# Altium PCB fpga-wing.PcbDoc
Units mm, origin at the board's own origin, x right, y up, seen from the top; angles counter-clockwise.
Board outline 87.63 x 71.12 mm, 4 copper layers (Top Layer, Internal Plane 1, Internal Plane 2, Bottom Layer), stack 0.462 mm thick; 41 components, 108 nets, 296 pads, 0 vias.
Unrouted connection lines stored in the file: 19.
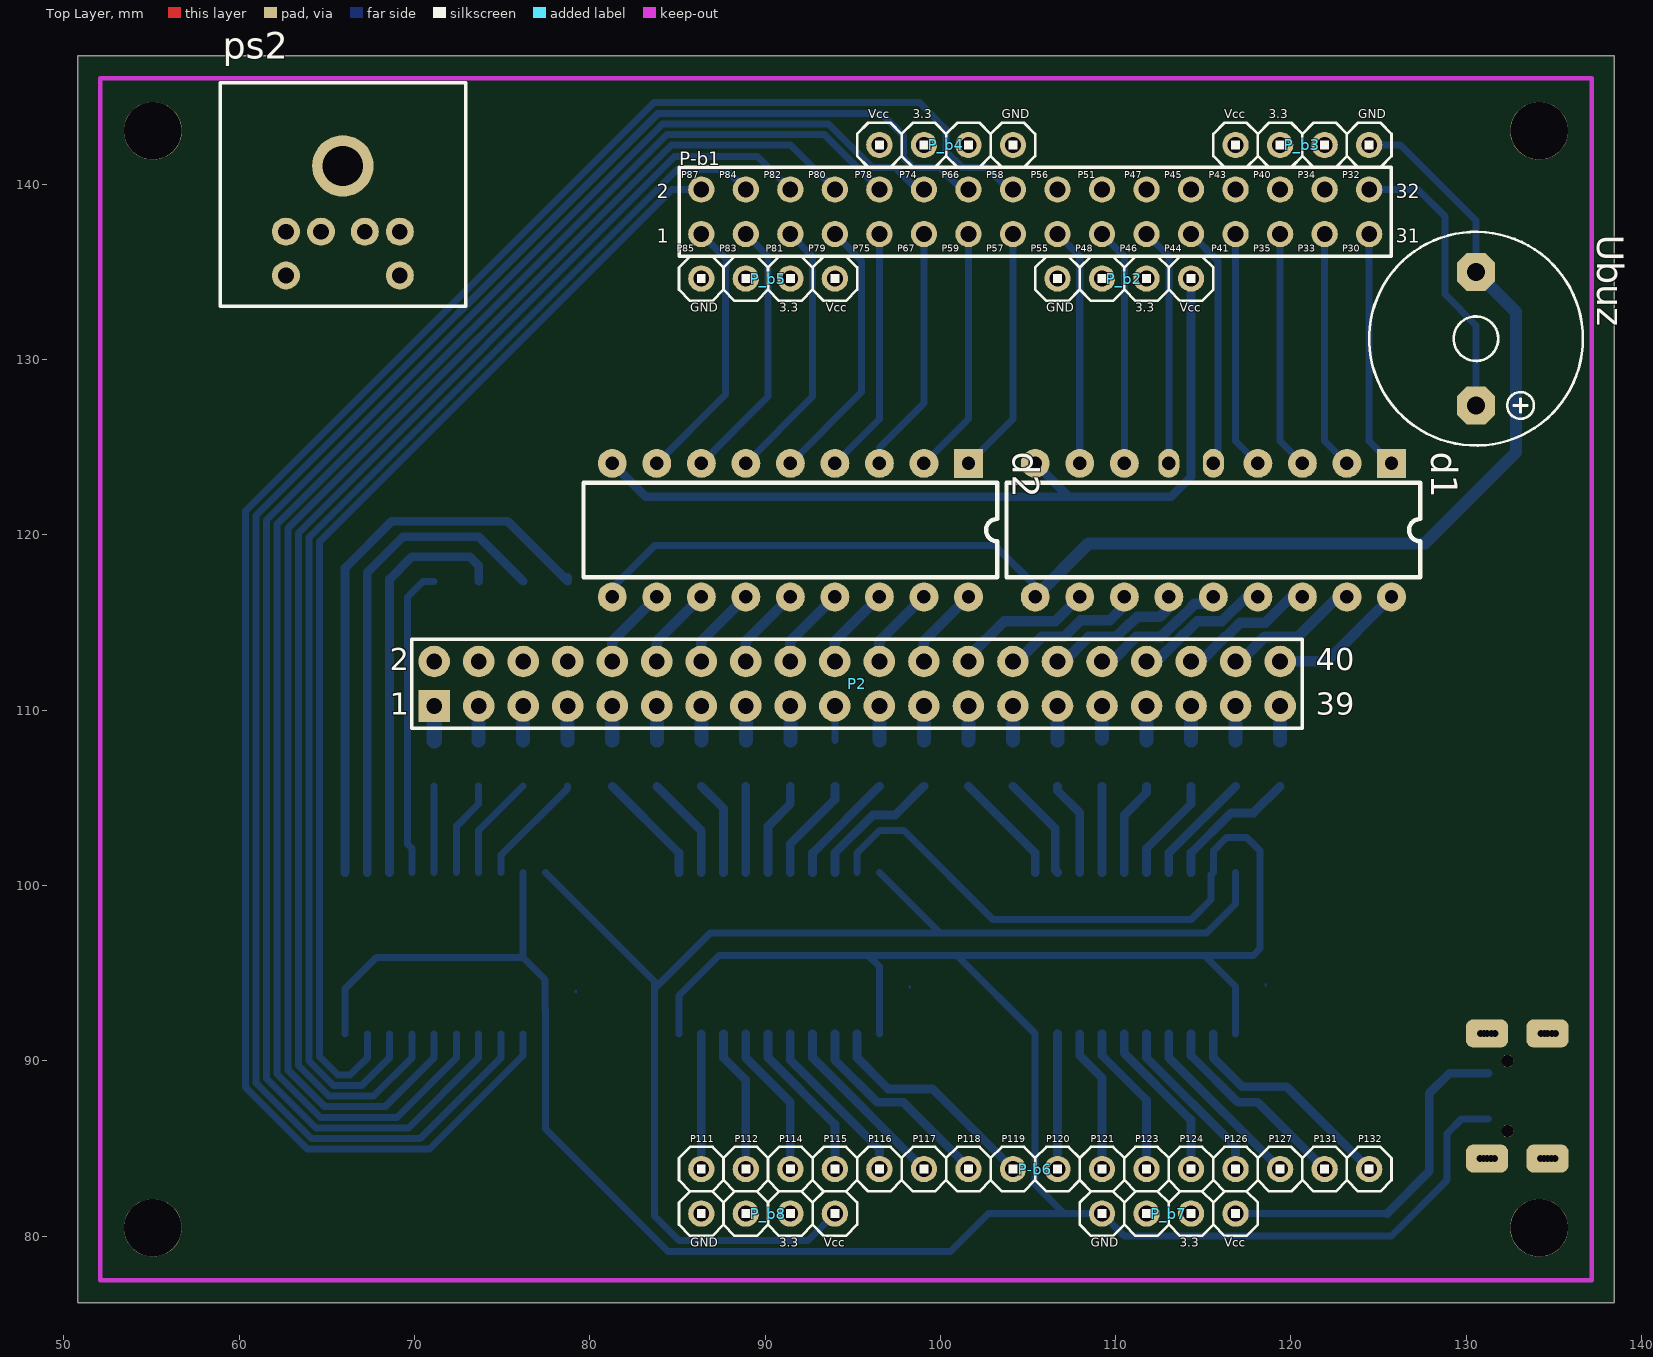
[diagram p0: Top Layer view]
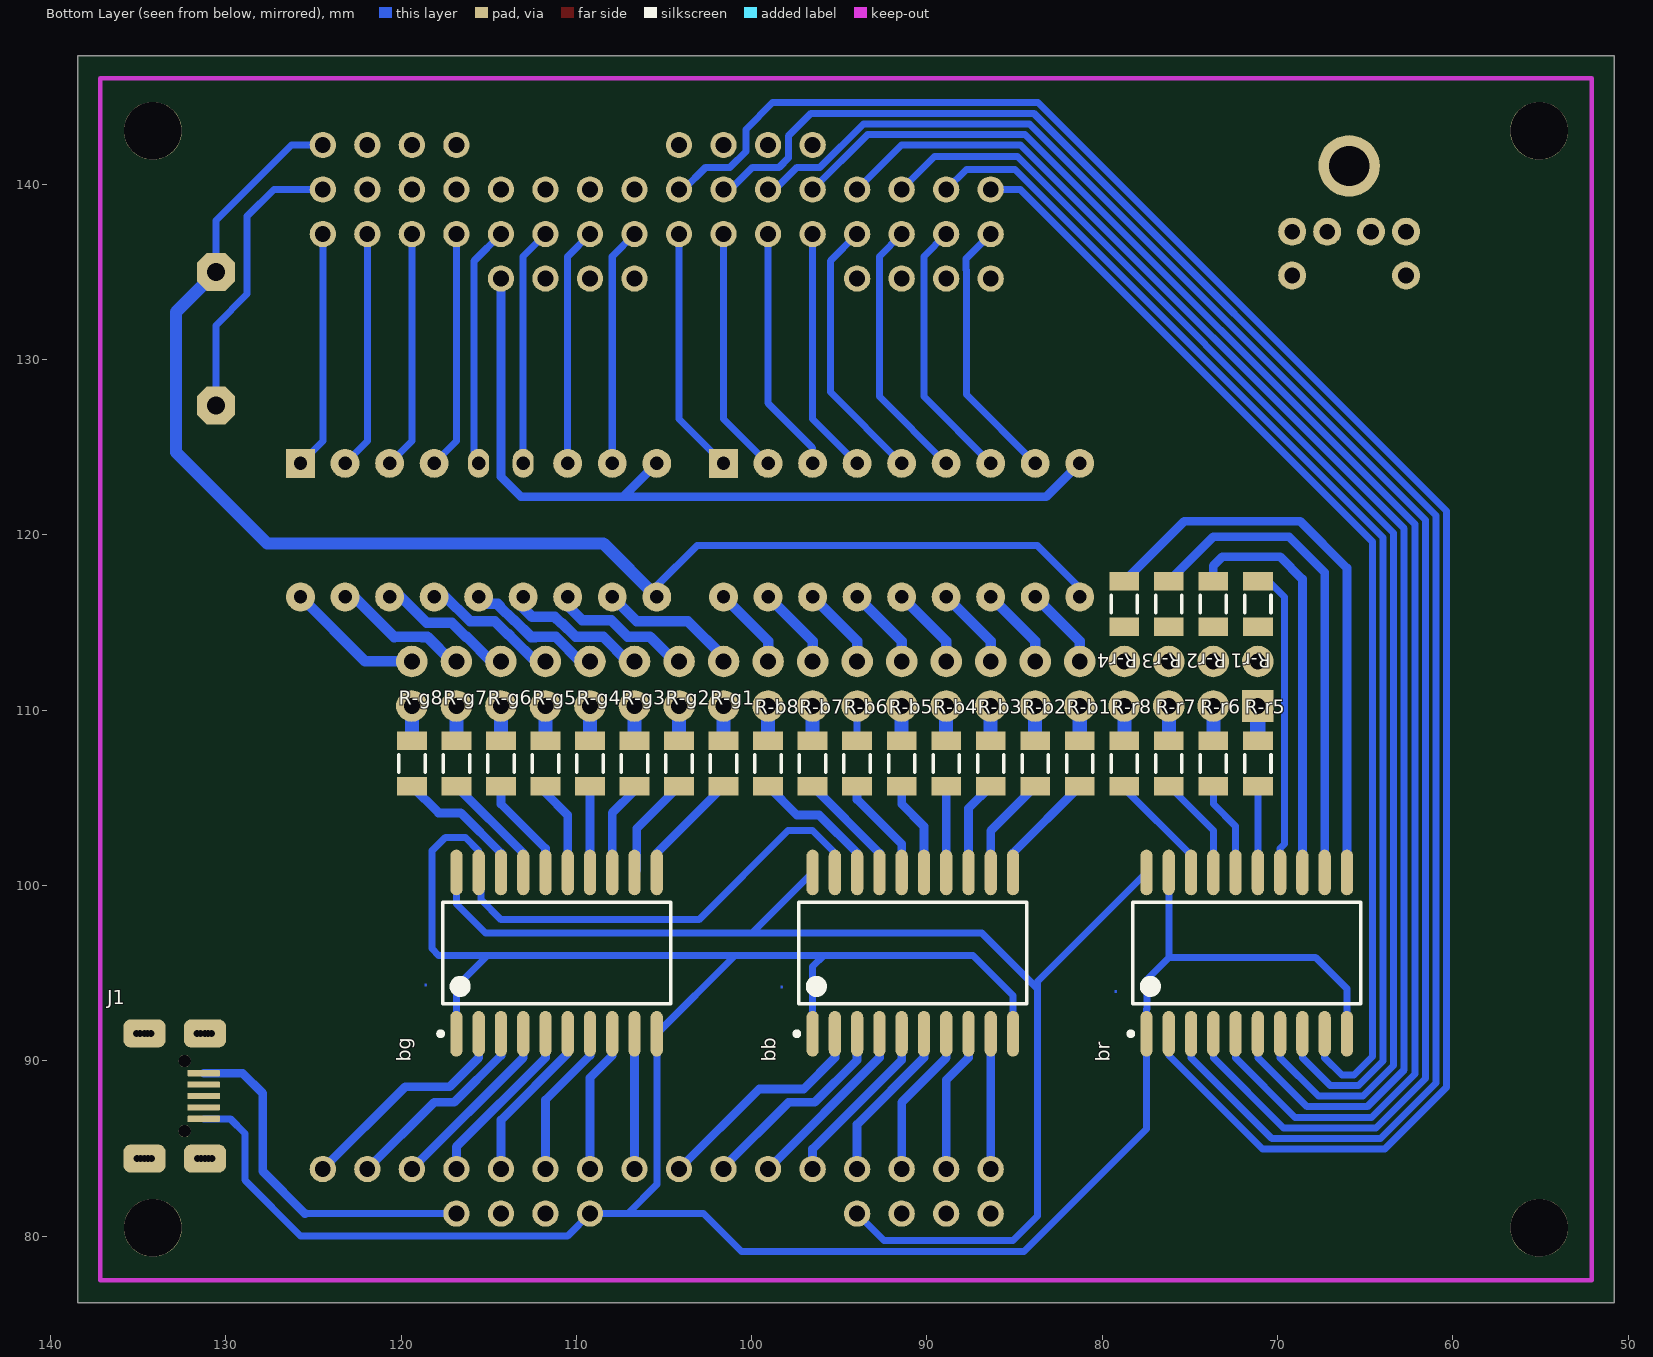
[diagram p1: Bottom Layer view, seen from below]
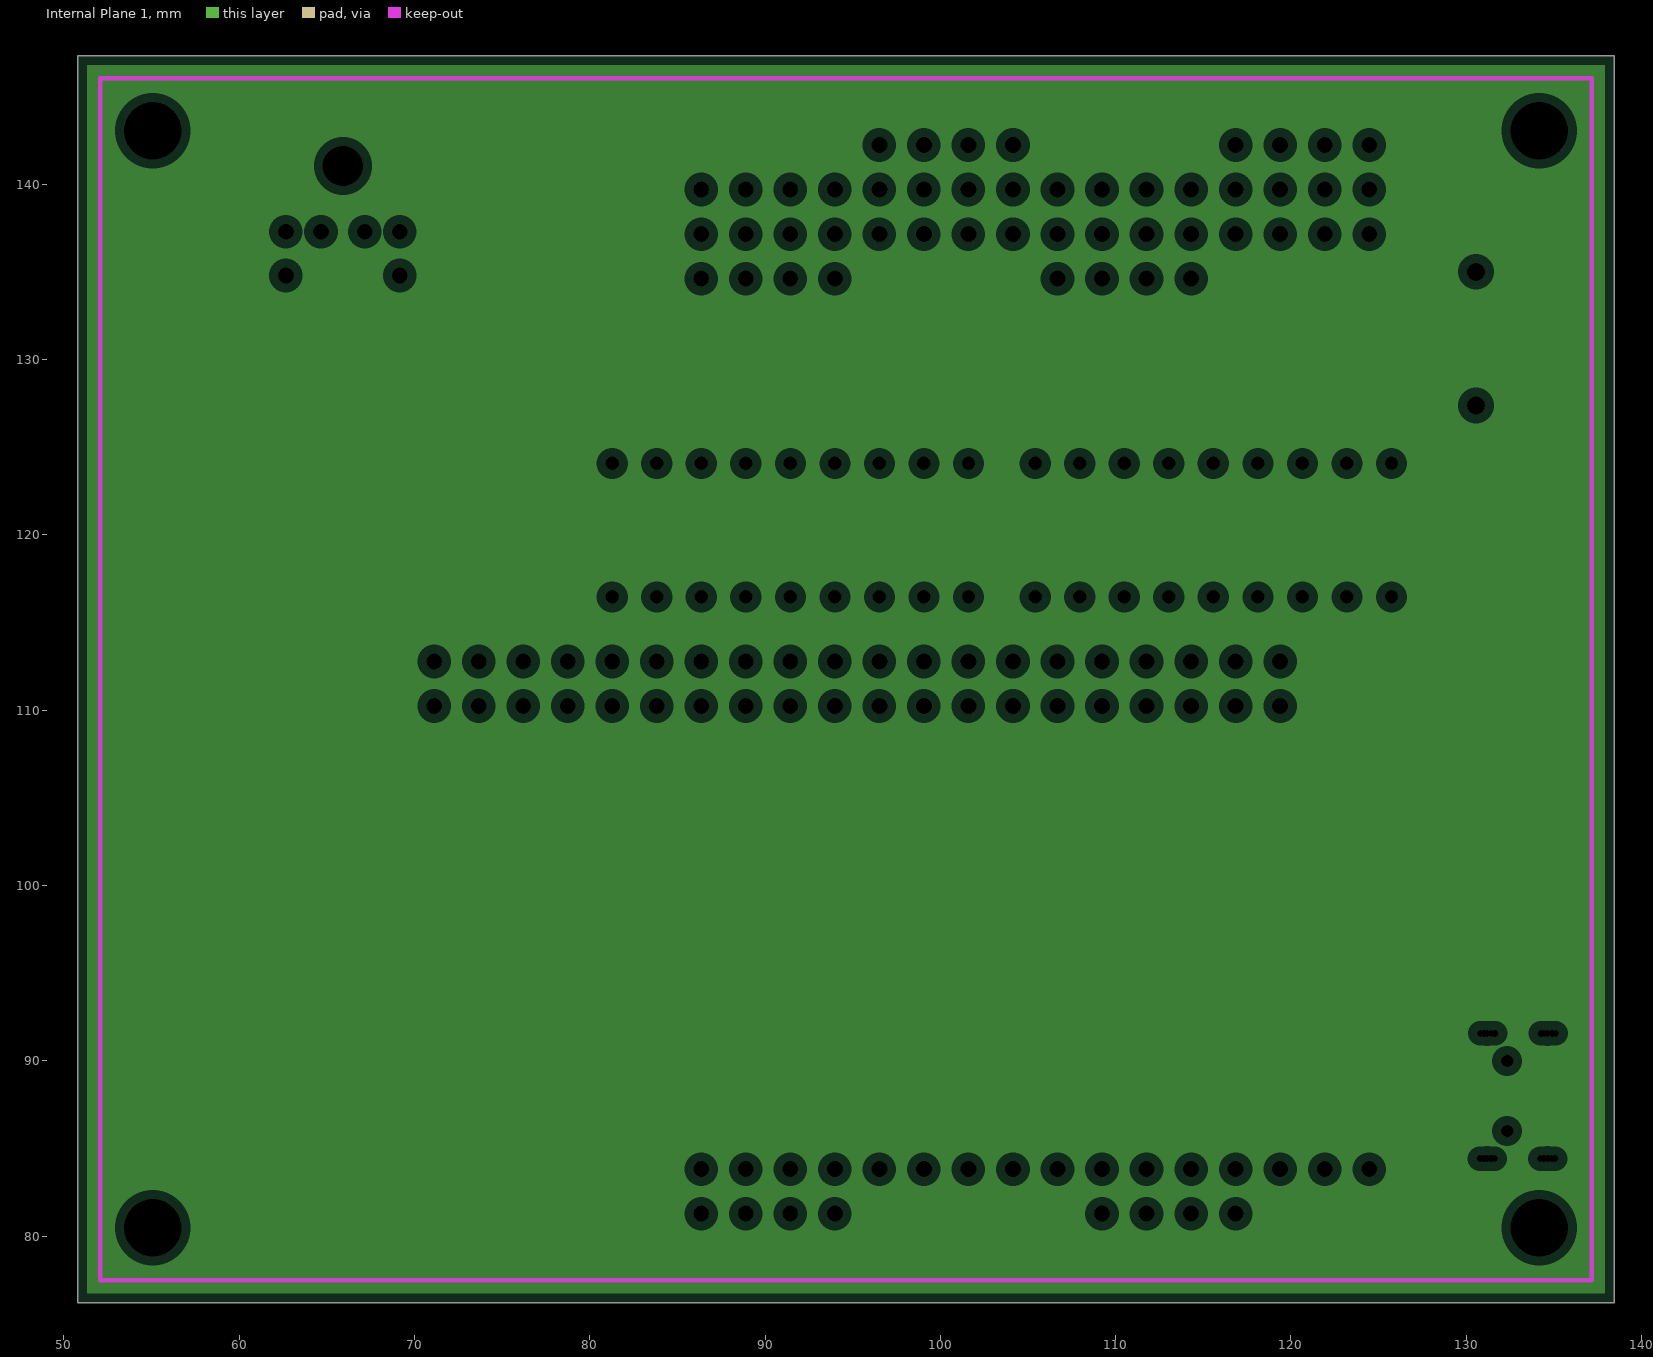
[diagram p2: Internal Plane 1, clearances drawn from the general rule]
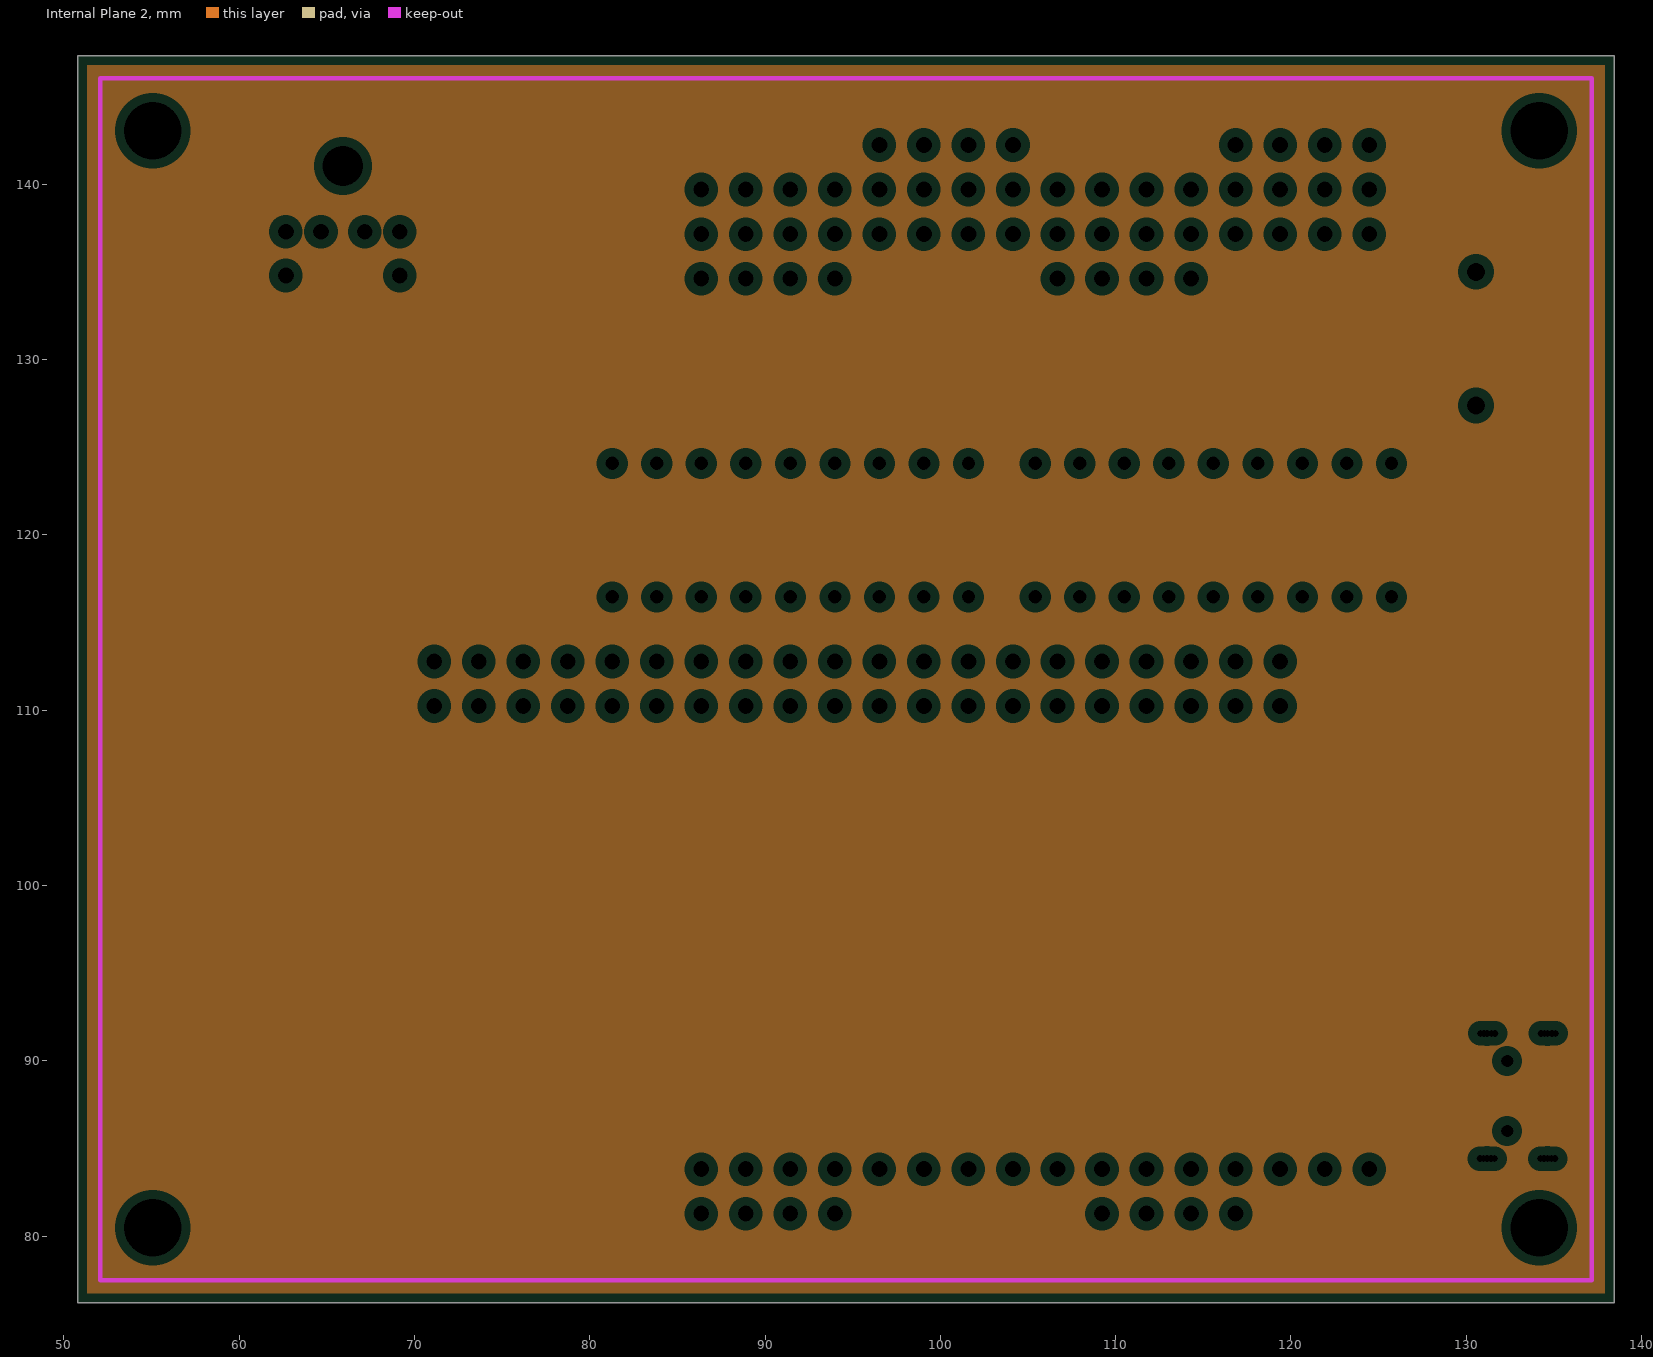
[diagram p3: Internal Plane 2, clearances drawn from the general rule]
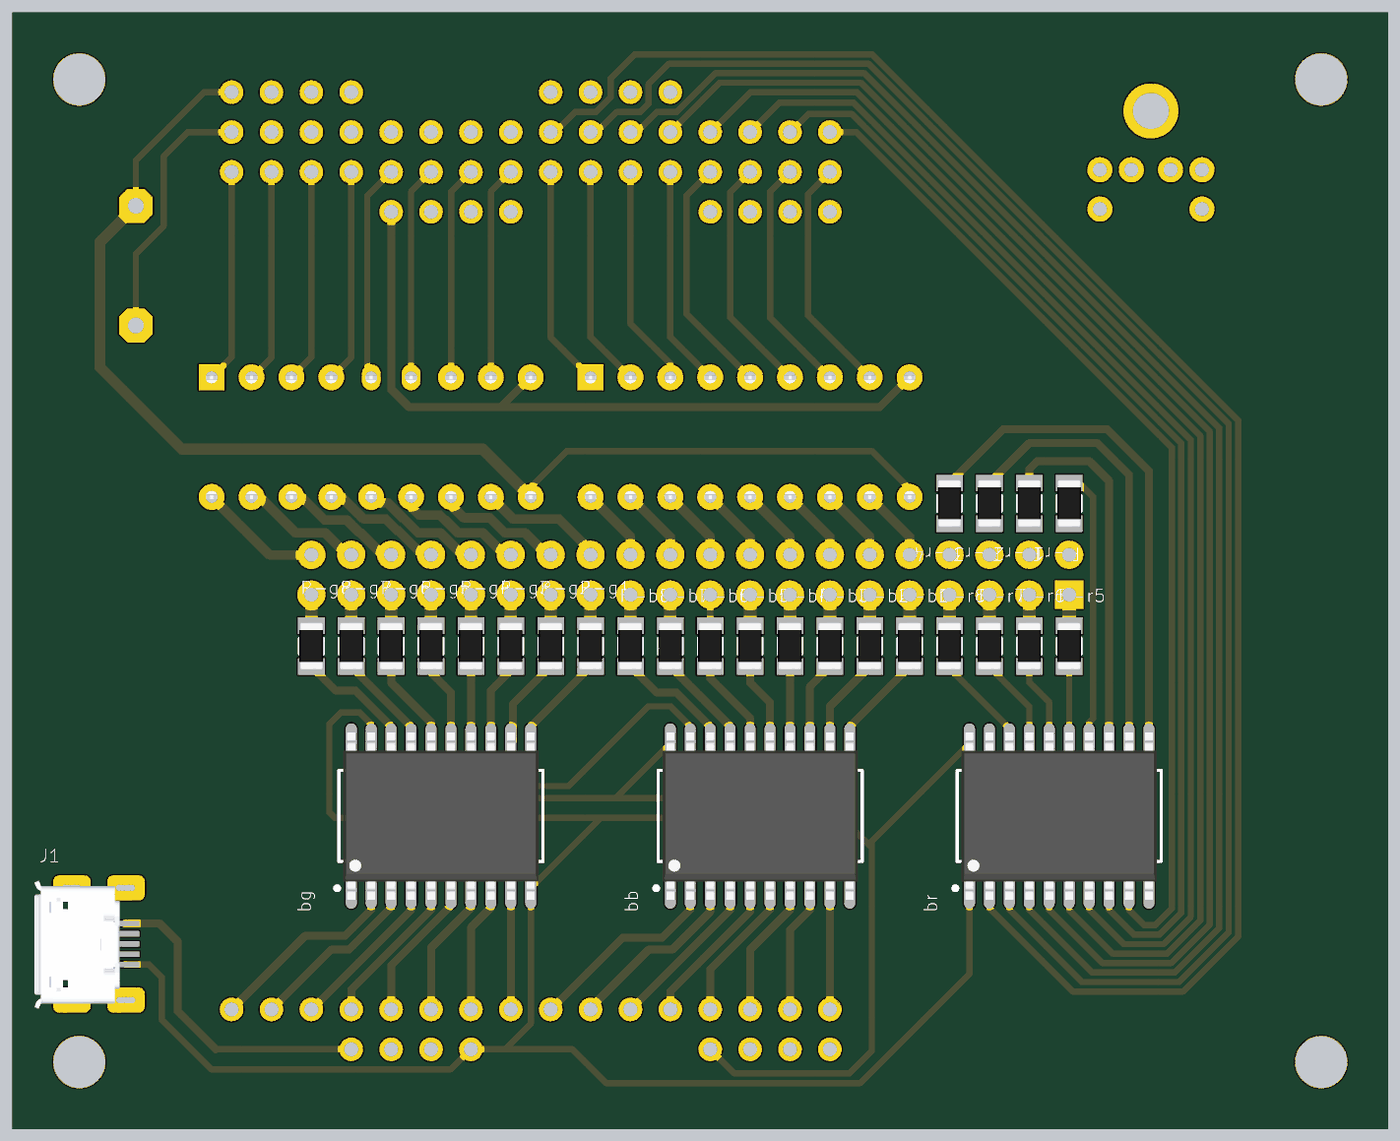
[diagram p4: 3D render of the assembled board from below, using the file's embedded part models]

## Layer stack, top to bottom
Top Solder: solder mask 0.0102, Solder Resist, Dk 3.5
Top Layer: signal copper 0.0356
Internal Plane 1: plane copper 0.0356
Internal Plane 2: plane copper 0.0356
Dielectric 1: dielectric 0.32, FR-4, Dk 4.8
Bottom Layer: signal copper 0.0356
Bottom Solder: solder mask 0.0102, Solder Resist, Dk 3.5

## Board outline
50.8,76.2 138.43,76.2 138.43,147.32 50.8,147.32

## Design rules (kind name [scope] priority, off if disabled: settings)
Clearance [All] p1: gap=0.203 ignorepadtopadclearanceinfootprint=FALSE except(0: Arc-Hole Track-Hole SMDPad-Hole THPad-Hole Via-Hole Fill-Hole Poly-Hole Region-Hole Text-Hole)
PlaneClearance [All] p1: clearance=0.508
PlaneConnect [All] p1: planeconnectstyle=Relief reliefexpansion=0.508 reliefentries=4 reliefconductorwidth=0.254 reliefairgap=0.254
PolygonConnect [All] p1: connectstyle=Relief reliefconductorwidth=0.254 reliefentries=4 polygonreliefangle="90 Angle" airgapwidth=0.254
RoomDefinition Sheet2 [InComponentClass('Sheet2')] p1: confinementstyle=ConfineIn formatcopy=TRUE lockcomponents=FALSE outline 139.573,75.184 145.161,75.184 145.161,133.477 139.573,133.477
RoutingVias [All] p1: holewidth=0.635 width=1.016 viastyle="Through Hole" minholewidth=0.711 minwidth=1.27 maxholewidth=0.711 maxwidth=1.27
SolderMaskExpansion [All] p1: expansion=0.102 istentingtop=FALSE
Width [All] p1: maxlimit=1.5 minlimit=0.3 preferedwidth=0.4
28 further rules are at their usual default settings.

## Components (designator, comment, footprint, x,y, rotation, side; value= is the part's Value field where it differs from the comment)
bb "74541(Bufer)" SO20_M 90.805,96.139 r90 bottom
bg "74541(Bufer)" SO20_M 111.125,96.139 r90 bottom
br "74541(Bufer)" SO20_M 71.755,96.139 r90 bottom
d1 "udn2981" DIP18#1 115.57,120.269 r270 top
d2 "udn2981" DIP18#2 91.44,120.269 r270 top
J1 "Micro_USB" microUSB 134.239,88.011 r180 bottom
P2 "Header 20X2" HDR2X20 71.12,110.236 r0 top locked
P-b1 "Header 16X2" HDR2X16 86.36,137.16 r0 top locked
P-b6 "Header 16" My_1X16 105.41,83.82 r0 top locked
P_b2 "Header 4" My_1X04 110.49,134.62 r0 top locked
P_b3 "Header 4" My_1X04 120.65,142.24 r0 top locked
P_b4 "Header 4" My_1X04 100.33,142.24 r0 top locked
P_b5 "Header 4" My_1X04 90.17,134.62 r0 top locked
P_b7 "Header 4" My_1X04 113.03,81.28 r0 top locked
P_b8 "Header 4" My_1X04 90.17,81.28 r0 top locked
ps2 "PS2-6PIN" My_PS2-6PIN 65.913,145.796 r0 top
R-b1 "Res1" SMD_RES_1206 81.28,105.664 r90 bottom
R-b2 "Res1" SMD_RES_1206 83.82,105.664 r90 bottom
R-b3 "Res1" SMD_RES_1206 86.36,105.664 r90 bottom
R-b4 "Res1" SMD_RES_1206 88.9,105.664 r90 bottom
R-b5 "Res1" SMD_RES_1206 91.44,105.664 r90 bottom
R-b6 "Res1" SMD_RES_1206 93.98,105.664 r90 bottom
R-b7 "Res1" SMD_RES_1206 96.52,105.664 r90 bottom
R-b8 "Res1" SMD_RES_1206 99.06,105.664 r90 bottom
R-g1 "Res1" SMD_RES_1206 101.6,105.664 r90 bottom
R-g2 "Res1" SMD_RES_1206 104.14,105.664 r90 bottom
R-g3 "Res1" SMD_RES_1206 106.68,105.664 r90 bottom
R-g4 "Res1" SMD_RES_1206 109.22,105.664 r90 bottom
R-g5 "Res1" SMD_RES_1206 111.76,105.664 r90 bottom
R-g6 "Res1" SMD_RES_1206 114.3,105.664 r90 bottom
R-g7 "Res1" SMD_RES_1206 116.84,105.664 r90 bottom
R-g8 "Res1" SMD_RES_1206 119.38,105.664 r90 bottom
R-r1 "Res1" SMD_RES_1206 71.12,117.348 r270 bottom
R-r2 "Res1" SMD_RES_1206 73.66,117.348 r270 bottom
R-r3 "Res1" SMD_RES_1206 76.2,117.348 r270 bottom
R-r4 "Res1" SMD_RES_1206 78.74,117.348 r270 bottom
R-r5 "Res1" SMD_RES_1206 71.12,105.664 r90 bottom
R-r6 "Res1" SMD_RES_1206 73.66,105.664 r90 bottom
R-r7 "Res1" SMD_RES_1206 76.2,105.664 r90 bottom
R-r8 "Res1" SMD_RES_1206 78.74,105.664 r90 bottom
Ubuz "Buzzer small" My_Buzzer 130.556,131.191 r270 top

## Footprints (in the part's own frame and the unit in brackets; to place one, negate y for a bottom-side part, rotate by r counter-clockwise, add the part's x,y. Pads: shape width x height; smd on the part's side, far side on the other; paste and mask are expansions set on the pad)
DIP18#1 [mil]
  rect 65x65 hole 30: 1(-150,400)
  round 65 hole 30: 2(-150,300) 3(-150,200) 4(-150,100) 7(-150,-200) 8(-150,-300) 9(-150,-400) 10(150,-400) 11(150,-300) 12(150,-200) 13(150,-100) 14(150,0) 15(150,100) 16(150,200) 17(150,300) 18(150,400)
  oval 65x47.24 hole 30: 5(-150,0) 6(-150,-100)
  silkscreen extent -106,-465 106,465, body extent -155,-453 155,453, height 200
DIP18#2 [mil]
  rect 65x65 hole 30: 1(-150,400)
  round 65 hole 30: 2(-150,300) 3(-150,200) 4(-150,100) 5(-150,0) 6(-150,-100) 7(-150,-200) 8(-150,-300) 9(-150,-400) 10(150,-400) 11(150,-300) 12(150,-200) 13(150,-100) 14(150,0) 15(150,100) 16(150,200) 17(150,300) 18(150,400)
  silkscreen extent -106,-465 106,465, body extent -155,-453 155,453, height 200
HDR2X16 [mm] "Connector; Header; 16x2 Position"
  round 1.5 hole 0.9: 1(0,0) 2(0,2.54) 3(2.54,0) 4(2.54,2.54) 5(5.08,0) 6(5.08,2.54) 7(7.62,0) 8(7.62,2.54) 9(10.16,0) 10(10.16,2.54) 11(12.7,0) 12(12.7,2.54) 13(15.24,0) 14(15.24,2.54) 15(17.78,0) 16(17.78,2.54) 17(20.32,0) 18(20.32,2.54) 19(22.86,0) 20(22.86,2.54) 21(25.4,0) 22(25.4,2.54) 23(27.94,0) 24(27.94,2.54) 25(30.48,0) 26(30.48,2.54) 27(33.02,0) 28(33.02,2.54) 29(35.56,0) 30(35.56,2.54) 31(38.1,0) 32(38.1,2.54)
  silkscreen extent -1.27,-1.27 39.37,3.81
HDR2X20 [mm] "Connector; Header; 20x2 Position"
  rect 1.8x1.8 hole 0.9: 1(0,0)
  round 1.8 hole 0.9: 2(0,2.54) 3(2.54,0) 4(2.54,2.54) 5(5.08,0) 6(5.08,2.54) 7(7.62,0) 8(7.62,2.54) 9(10.16,0) 10(10.16,2.54) 11(12.7,0) 12(12.7,2.54) 13(15.24,0) 14(15.24,2.54) 15(17.78,0) 16(17.78,2.54) 17(20.32,0) 18(20.32,2.54) 19(22.86,0) 20(22.86,2.54) 21(25.4,0) 22(25.4,2.54) 23(27.94,0) 24(27.94,2.54) 25(30.48,0) 26(30.48,2.54) 27(33.02,0) 28(33.02,2.54) 29(35.56,0) 30(35.56,2.54) 31(38.1,0) 32(38.1,2.54) 33(40.64,0) 34(40.64,2.54) 35(43.18,0) 36(43.18,2.54) 37(45.72,0) 38(45.72,2.54) 39(48.26,0) 40(48.26,2.54)
  silkscreen extent -1.27,-1.27 49.53,3.81
microUSB [mm]
  rrect20% 1.85x0.35 smd: 1(2.98,1.277) 2(2.98,0.627) 3(2.98,-0.023) 4(2.98,-0.673) 5(2.98,-1.323)
  round 0 hole 0.4: ""(-0.845,3.552) ""(-0.82,-3.598) ""(-0.645,3.552) ""(-0.62,-3.598) ""(-0.22,3.552) ""(-0.195,-3.598) ""(-0.02,3.552) ""(0.005,-3.598) ""(2.605,3.552) ""(2.63,-3.598) ""(2.805,3.552) ""(2.83,-3.598) ""(3.23,3.552) ""(3.255,-3.598) ""(3.43,3.552) ""(3.455,-3.598)
  rrect50% 2.4x1.6 hole 0.4 paste+0: ""(-0.395,-3.593)
  rrect50% 2.4x1.6 hole 0.4: ""(-0.395,3.547) ""(3.055,-3.593) ""(3.055,3.547)
  round 0.7 hole 0.7: ""(1.905,-2.023) ""(1.905,1.977)
  body extent -0.01,-0.07 -0.01,-0.07, height 1.27
My_1X04 [mm]
  round 1.5 hole 0.9: 1(-3.81,0) 2(-1.27,0) 3(1.27,0) 4(3.81,0)
  silkscreen extent -5.08,-1.27 5.08,1.27
My_1X16 [mm]
  round 1.5 hole 0.9: 1(-19.05,0) 2(-16.51,0) 3(-13.97,0) 4(-11.43,0) 5(-8.89,0) 6(-6.35,0) 7(-3.81,0) 8(-1.27,0) 9(1.27,0) 10(3.81,0) 11(6.35,0) 12(8.89,0) 13(11.43,0) 14(13.97,0) 15(16.51,0) 16(19.05,0)
  silkscreen extent -20.32,-1.27 20.32,1.27
My_Buzzer [mil]
  oct 85x85 hole 40: +(150,0) -(-150,0)
  silkscreen extent -240,-240 240,240
My_PS2-6PIN [mm]
  round 1.6 hole 0.9: 1(-1.25,-8.5) 2(1.25,-8.5) 3(-3.25,-8.5) 4(3.25,-8.5) 5(-3.25,-11) 6(3.25,-11)
  round 3.5 hole 2.3: S(0,-4.75)
  silkscreen extent -7,-12.75 7,0
SMD_RES_1206 [mm] "Chip Resistor, 2-Leads, Body 3.2x1.6mm, IPC High Density _ (0.125 W)"
  rect 1.05x1.7 smd: 1(0,0) 2(2.596,0)
  silkscreen extent 0.8,-0.75 1.8,0.75, body extent 1.3,0 1.3,0
SO20_M [mm] "SOIC, 20-Leads, Body 12.8x7.5mm, Pitch 1.27mm, IPC Low Density"
  oval 2.6x0.7 smd: 1(-4.6,5.715) 2(-4.6,4.445) 3(-4.6,3.175) 4(-4.6,1.905) 5(-4.6,0.635) 6(-4.6,-0.635) 7(-4.6,-1.905) 8(-4.6,-3.175) 9(-4.6,-4.445) 10(-4.6,-5.715) 11(4.6,-5.715) 12(4.6,-4.445) 13(4.6,-3.175) 14(4.6,-1.905) 15(4.6,-0.635) 16(4.6,0.635) 17(4.6,1.905) 18(4.6,3.175) 19(4.6,4.445) 20(4.6,5.715)
  silkscreen extent -4.72,-6.5 2.9,6.74, body extent 0,5.72 0,5.72

## Part data
P2: "Header, 20-Pin, Dual row"
P-b1: "Header, 16-Pin, Dual row"
P-b6: "Header, 16-Pin"
P_b2 P_b3 P_b4 P_b5 P_b7 P_b8: "Header, 4-Pin"
ps2: "6 Pin Through Hole PS2 Socket (Kycon P/N)"
R-b1 R-b2 R-b3 R-b4 R-b5 R-b6 R-b7 R-b8 R-g1 R-g2 R-g3 R-g4 R-g5 R-g6 R-g7 R-g8 R-r1 R-r2 R-r3 R-r4 R-r5 R-r6 R-r7 R-r8: "Resistor"
Ubuz: library part Buzzer, "5-12v small buzzer (12mm)"

## Free pads (board coordinates)
  round 3.3 hole 3.3: 0(55.07,80.47)
  round 3.302 hole 3.302: 0(55.07,143.05) 0(134.16,80.47) 0(134.16,143.05)

## Nets (pads, with @x,y where several pads share a name; then routed paths per layer and width w, separated by ;. In a path a pad name is that pad's centre, name@x,y a point inside that pad or via, vN(x,y) a via of type N, cw(c..) or ccw(c..) an arc to the next point about the centre after c; other vN are vias at no path point)
3.3V: P_b2.3 P_b3.2 P_b4.2 P_b5.3 P_b7.3 P_b8.3
A1: d1.11 P2.26 | length 8
  Bottom Layer w0.6: P2.26 101.6,113.03 103.632,115.062 106.553,115.062 d1.11
A2: d1.12 P2.28 | length 8.2
  Bottom Layer w0.6: P2.28 104.394,112.776 105.797,114.179 107.067,114.179 108.018,115.13 109.669,115.13 110.49,115.951 d1.12
A3: d1.13 P2.30 | length 8.2
  Bottom Layer w0.6: P2.30 107.061,112.776 108.464,114.179 110.043,114.179 110.846,114.982 110.892,114.982 111.226,115.316 112.522,115.316 113.03,115.824 d1.13
A4: d1.14 P2.32 | length 8.1
  Bottom Layer w0.6: P2.32 109.776,112.776 111.179,114.179 112.341,114.179 112.347,114.173 112.577,114.173 113.534,115.13 113.58,115.13 114.359,115.909 114.359,115.955 114.482,116.078 115.57,116.078 d1.14
A5: d1.15 P2.34 | length 8.7
  Bottom Layer w0.6: P2.34 112.316,112.776 112.897,113.357 113.139,113.6 113.624,114.085 113.867,114.327 113.913,114.327 114.648,115.062 116.052,115.062 117.526,116.535 118.11,115.951 d1.15
A6: d1.16 P2.36 | length 7.9
  Bottom Layer w0.6: P2.36 114.856,112.776 116.259,114.179 116.305,114.179 117.108,114.982 118.538,114.982 120.015,116.459 d1.16
A7: d1.17 P2.38 | length 7.9
  Bottom Layer w0.6: P2.38 117.094,112.776 118.491,114.173 118.793,114.173 118.799,114.179 120.39,114.179 120.396,114.173 122.682,116.459 d1.17
A8: d1.18 P2.40 | length 7.9
  Bottom Layer w0.6: P2.40 122.047,112.776 d1.18
A9: d2.18 P2.24 | length 4.7
  Bottom Layer w0.6: P2.24 99.06,113.919 d2.18
A10: d2.17 P2.22 | length 4.7
  Bottom Layer w0.6: P2.22 96.52,113.919 d2.17
A11: d2.16 P2.20 | length 4.7
  Bottom Layer w0.6: P2.20 93.98,113.919 d2.16
A12: d2.15 P2.18 | length 4.7
  Bottom Layer w0.6: P2.18 91.44,113.919 d2.15
A13: d2.14 P2.16 | length 4.7
  Bottom Layer w0.6: P2.16 88.9,113.919 d2.14
A14: d2.13 P2.14 | length 4.7
  Bottom Layer w0.6: P2.14 86.36,113.919 d2.13
A15: d2.12 P2.12 | length 4.7
  Bottom Layer w0.6: P2.12 83.82,113.919 d2.12
A16: d2.11 P2.10 | length 4.7
  Bottom Layer w0.6: P2.10 81.28,113.919 d2.11
B1: P2.9 R-b1.2 | length 2
  Bottom Layer w0.8: R-b1.2 P2.9
B2: P2.11 R-b2.2 | length 2
  Bottom Layer w0.8: R-b2.2 P2.11
B3: P2.13 R-b3.2 | length 2
  Bottom Layer w0.8: R-b3.2 P2.13
B4: P2.15 R-b4.2 | length 2
  Bottom Layer w0.8: R-b4.2 P2.15
B5: P2.17 R-b5.2 | length 2
  Bottom Layer w0.8: R-b5.2 P2.17
B6: P2.19 R-b6.2 | length 2
  Bottom Layer w0.4: R-b6.2 P2.19
B7: P2.21 R-b7.2 | length 2
  Bottom Layer w0.8: R-b7.2 P2.21
B8: P2.23 R-b8.2 | length 2
  Bottom Layer w0.8: R-b8.2 P2.23
BUZ: P-b1.32 Ubuz.+ | length 16.5
  Bottom Layer w0.4: P-b1.32 127.254,139.7 128.778,138.176 128.778,133.731 130.556,131.953 Ubuz.+
FPGA_A1: d2.1 P-b1.15 | length 14.1
  Bottom Layer w0.4: d2.1 104.14,126.619 P-b1.15
FPGA_A2: d2.2 P-b1.13 | length 14.1
  Bottom Layer w0.4: d2.2 101.6,126.619 P-b1.13
FPGA_A3: d2.3 P-b1.11 | length 13.2
  Bottom Layer w0.4: 96.52,124.968 99.06,127.508 P-b1.11
FPGA_A4: d2.4 P-b1.9 | length 14.1
  Bottom Layer w0.4: d2.4 96.52,126.619 P-b1.9
FPGA_A5: d2.5 P-b1.7 | length 15.4
  Bottom Layer w0.4: d2.5 95.504,128.143 95.504,135.636 P-b1.7
FPGA_A6: d2.6 P-b1.5 | length 15.2
  Bottom Layer w0.4: d2.6 92.71,127.889 92.71,135.89 P-b1.5
FPGA_A7: d2.7 P-b1.3 | length 15.2
  Bottom Layer w0.4: d2.7 90.17,127.889 90.17,135.89 P-b1.3
FPGA_A8: d2.8 P-b1.1 | length 15.3
  Bottom Layer w0.4: d2.8 87.747,128.006 87.747,135.108 87.757,135.118 87.757,135.763 P-b1.1
FPGA_A9: d1.8 P-b1.17 | length 13.6
  Bottom Layer w0.4: P-b1.17 107.95,135.89 d1.8
FPGA_A10: d1.7 P-b1.19 | length 13.6
  Bottom Layer w0.4: P-b1.19 110.49,135.89 d1.7
FPGA_A11: d1.6 P-b1.21 | length 13.6
  Bottom Layer w0.4: P-b1.21 113.03,135.89 d1.6
FPGA_A12: d1.5 P-b1.23 | length 13.8
  Bottom Layer w0.4: P-b1.23 115.824,135.636 115.824,124.333 d1.5
FPGA_A13: d1.4 P-b1.25 | length 13.6
  Bottom Layer w0.4: P-b1.25 116.84,125.349 d1.4
FPGA_A14: d1.3 P-b1.27 | length 13.6
  Bottom Layer w0.4: P-b1.27 119.38,125.349 d1.3
FPGA_A15: d1.2 P-b1.29 | length 13.6
  Bottom Layer w0.4: P-b1.29 121.92,125.349 d1.2
FPGA_A16: d1.1 P-b1.31 | length 13.6
  Bottom Layer w0.4: P-b1.31 124.46,125.349 d1.1
FPGA_B1: bb.9 P-b6.1 | length 7.7
  Bottom Layer w0.5: P-b6.1 bb.9
FPGA_B2: bb.8 P-b6.2 | length 8.2
  Bottom Layer w0.5: bb.8 87.63,90.17 88.9,88.9 P-b6.2
FPGA_B3: bb.7 P-b6.3 | length 8.8
  Bottom Layer w0.5: bb.7 88.9,90.17 91.44,87.63 P-b6.3
FPGA_B4: bb.6 P-b6.4 | length 9.3
  Bottom Layer w0.5: bb.6 90.17,90.17 93.98,86.36 P-b6.4
FPGA_B5: bb.5 P-b6.5 | length 9.8
  Bottom Layer w0.5: bb.5 91.44,90.043 96.52,84.963 P-b6.5
FPGA_B6: bb.4 P-b6.6 | length 10.3
  Bottom Layer w0.5: bb.4 92.71,90.17 P-b6.6
FPGA_B7: bb.3 P-b6.7 | length 11.8
  Bottom Layer w0.5: bb.3 93.98,90.043 96.393,87.63 97.889,87.63 101.6,83.919 P-b6.7
FPGA_B8: bb.2 P-b6.8 | length 12.9
  Bottom Layer w0.5: bb.2 95.25,90.17 97.028,88.392 99.568,88.392 P-b6.8
FPGA_G1: bg.9 P-b6.9 | length 7.7
  Bottom Layer w0.5: P-b6.9 bg.9
FPGA_G2: bg.8 P-b6.10 | length 8.2
  Bottom Layer w0.5: bg.8 107.95,90.297 109.22,89.027 P-b6.10
FPGA_G3: bg.7 P-b6.11 | length 8.8
  Bottom Layer w0.5: bg.7 109.22,90.297 111.76,87.757 P-b6.11
FPGA_G4: bg.6 P-b6.12 | length 9.3
  Bottom Layer w0.5: bg.6 110.49,90.424 114.3,86.614 P-b6.12
FPGA_G5: bg.5 P-b6.13 | length 9.8
  Bottom Layer w0.5: bg.5 111.76,90.17 116.84,85.09 P-b6.13
FPGA_G6: bg.4 P-b6.14 | length 10.3
  Bottom Layer w0.5: bg.4 113.03,90.17 P-b6.14
FPGA_G7: bg.3 P-b6.15 | length 11.5
  Bottom Layer w0.5: bg.3 114.3,90.297 116.967,87.63 118.11,87.63 P-b6.15
FPGA_G8: bg.2 P-b6.16 | length 12.9
  Bottom Layer w0.5: bg.2 115.57,90.17 117.221,88.519 119.761,88.519 P-b6.16
FPGA_R1: br.6 P-b1.8 | length 83.9
  Bottom Layer w0.4: br.6 71.12,90.17 68.326,87.376 64.878,87.376 62.77,89.484 62.77,120.356 84.654,142.24 91.44,142.24 P-b1.8
FPGA_R2: br.7 P-b1.6 | length 77.6
  Bottom Layer w0.4: br.7 69.85,90.17 67.659,87.979 65.128,87.979 63.373,89.734 63.373,120.106 84.84,141.573 89.567,141.573 P-b1.6
FPGA_R3: br.8 P-b1.4 | length 71.2
  Bottom Layer w0.4: br.8 68.58,90.17 66.992,88.582 65.378,88.582 63.976,89.984 63.976,119.856 84.973,140.853 87.747,140.853 P-b1.4
FPGA_R4: br.9 P-b1.2 | length 64.4
  Bottom Layer w0.4: br.9 67.31,90.17 66.326,89.186 65.627,89.186 64.579,90.234 64.579,119.606 84.673,139.7 P-b1.2
FPGA_R5: br.5 P-b1.10 | length 90.3
  Bottom Layer w0.4: br.5 72.39,90.17 68.993,86.773 64.628,86.773 62.167,89.234 62.167,120.606 84.404,142.843 93.377,142.843 P-b1.10
FPGA_R6: br.4 P-b1.12 | length 96.6
  Bottom Layer w0.4: br.4 73.66,90.17 69.66,86.17 64.378,86.17 61.563,88.984 61.563,120.856 84.154,143.446 93.627,143.446 96.103,140.97 97.409,140.97 98.679,139.7 P-b1.12
FPGA_R7: br.3 P-b1.14 | length 103.6
  Bottom Layer w0.4: br.3 74.93,90.17 70.326,85.566 64.128,85.566 60.96,88.734 60.96,121.105 83.904,144.05 96.615,144.05 97.907,142.758 97.907,141.488 98.425,140.97 99.949,140.97 101.219,139.7 P-b1.14
FPGA_R8: br.2 P-b1.16 | length 109.8
  Bottom Layer w0.4: br.2 76.2,90.297 70.866,84.963 63.878,84.963 60.357,88.485 60.357,121.355 83.655,144.653 98.806,144.653 100.33,143.129 100.33,141.879 101.239,140.97 102.616,140.97 103.886,139.7 P-b1.16
G1: P2.25 R-g1.2 | length 2
  Bottom Layer w0.8: R-g1.2 P2.25
G2: P2.27 R-g2.2 | length 2
  Bottom Layer w0.8: R-g2.2 P2.27
G3: P2.29 R-g3.2 | length 2
  Bottom Layer w0.8: R-g3.2 P2.29
G4: P2.31 R-g4.2 | length 1.8
  Bottom Layer w0.8: R-g4.2@109.22,108.387 P2.31
G5: P2.33 R-g5.2 | length 2
  Bottom Layer w0.8: R-g5.2 P2.33
G6: P2.35 R-g6.2 | length 2
  Bottom Layer w0.8: R-g6.2 P2.35
G7: P2.37 R-g7.2 | length 2
  Bottom Layer w0.8: R-g7.2 P2.37
G8: P2.39 R-g8.2 | length 2
  Bottom Layer w0.8: R-g8.2 P2.39
GND: bb.1 bb.10 bb.19 bg.1 bg.10 bg.19 br.1 br.10 br.19 d1.10 d2.10 J1.5 P_b2.1 P_b3.4 P_b4.4 P_b5.1 P_b7.1 P_b8.1 Ubuz.- | length 271
  Bottom Layer w0.4: br.10 66.04,94.107 67.818,95.885 76.2,95.885 ; br.19 76.2,95.885 ; d2.10 81.28,116.967 83.693,119.38 103.124,119.38 105.41,117.094 d1.10 ; bb.10 85.09,93.726 87.376,96.012 95.885,96.012 ; bb.19 95.25,101.854 96.52,103.124 97.917,103.124 102.997,98.044 114.3,98.044 115.443,99.187 115.443,100.612 bg.19 115.57,101.981 116.332,102.743 117.475,102.743 118.237,101.981 118.237,96.393 117.856,96.012 115.062,96.012 ; bb.1 96.52,95.377 95.885,96.012 ; bg.1 116.84,94.234 115.062,96.012 ; P_b3.4 126.238,142.24 130.556,137.922 Ubuz.- ; J1.5 129.741,86.688 128.905,85.852 128.905,83.185 125.73,80.01 110.49,80.01 P_b7.1 107.061,81.28 ; 76.2,95.885 77.446,94.639 77.446,92.958 77.47,92.958 br.1 77.47,86.106 84.455,79.121 100.584,79.121 102.743,81.28 107.061,81.28 ; 95.885,96.012 100.937,96.012 ; 100.937,96.012 115.062,96.012 ; 100.937,96.012 bg.10 105.41,82.931 107.061,81.28
  Bottom Layer w0.7: d1.10 108.458,119.507 127.635,119.507 132.842,124.714 132.842,132.715 Ubuz.-
Netbb_11: bb.11 R-b1.1 | length 6.5
  Bottom Layer w0.5: R-b1.1 85.09,101.854 bb.11
Netbb_12: bb.12 R-b2.1 | length 6
  Bottom Layer w0.5: R-b2.1 86.36,103.124 bb.12
Netbb_13: bb.13 R-b3.1 | length 5.5
  Bottom Layer w0.5: R-b3.1 87.63,104.394 bb.13
Netbb_14: bb.14 R-b4.1 | length 4.9
  Bottom Layer w0.5: bb.14 R-b4.1
Netbb_15: bb.15 R-b5.1 | length 5.5
  Bottom Layer w0.5: bb.15 90.17,103.378 91.44,104.648 R-b5.1
Netbb_16: bb.16 R-b6.1 | length 6
  Bottom Layer w0.5: bb.16 91.44,102.362 93.98,104.902 R-b6.1
Netbb_17: bb.17 R-b7.1 | length 6.5
  Bottom Layer w0.5: bb.17 92.71,101.854 R-b7.1
Netbb_18: bb.18 R-b8.1 | length 7.8
  Bottom Layer w0.5: bb.18 93.98,101.854 96.139,104.013 97.409,104.013 R-b8.1
Netbg_11: bg.11 R-g1.1 | length 6.5
  Bottom Layer w0.5: R-g1.1 105.41,101.854 bg.11
Netbg_12: bg.12 R-g2.1 | length 6
  Bottom Layer w0.5: R-g2.1 106.553,103.251 106.553,100.866 bg.12
Netbg_13: bg.13 R-g3.1 | length 5.5
  Bottom Layer w0.5: R-g3.1 106.68,105.41 107.95,104.14 bg.13
Netbg_14: bg.14 R-g4.1 | length 4.9
  Bottom Layer w0.5: bg.14 R-g4.1
Netbg_15: bg.15 R-g5.1 | length 5.5
  Bottom Layer w0.5: bg.15 110.49,104.013 111.76,105.283 R-g5.1
Netbg_16: bg.16 R-g6.1 | length 6
  Bottom Layer w0.5: bg.16 111.76,102.108 114.3,104.648 R-g6.1
Netbg_17: bg.17 R-g7.1 | length 6.5
  Bottom Layer w0.5: bg.17 113.03,101.854 R-g7.1
Netbg_18: bg.18 R-g8.1 | length 7.8
  Bottom Layer w0.5: bg.18 114.3,101.854 116.586,104.14 117.856,104.14 R-g8.1
Netbr_11: br.11 R-r4.1 | length 32.8
  Bottom Layer w0.5: br.11 66.04,118.11 68.707,120.777 75.311,120.777 R-r4.1 R-r4.1@78.74,117.574
Netbr_12: br.12 R-r3.1 | length 27.9
  Bottom Layer w0.5: br.12 67.31,117.856 69.342,119.888 73.66,119.888 R-r3.1
Netbr_13: br.13 R-r2.1 | length 23.4
  Bottom Layer w0.5: br.13 68.58,117.475 69.85,118.745 73.152,118.745 73.66,118.237 R-r2.1
Netbr_14: br.14 R-r1.1 | length 17.7
  Bottom Layer w0.4: br.14 69.85,102.108 69.596,102.362 69.596,116.459 70.485,117.348 R-r1.1
Netbr_15: br.15 R-r5.1 | length 4.9
  Bottom Layer w0.4: br.15 R-r5.1
Netbr_16: br.16 R-r6.1 | length 5.5
  Bottom Layer w0.4: br.16 72.39,103.378 73.66,104.648 R-r6.1
Netbr_17: br.17 R-r7.1 | length 6
  Bottom Layer w0.4: br.17 73.66,103.124 R-r7.1
Netbr_18: br.18 R-r8.1 | length 6.5
  Bottom Layer w0.4: br.18 74.93,101.727 78.74,105.537 R-r8.1
R1: P2.2 R-r1.2
R2: P2.4 R-r2.2
R3: P2.6 R-r3.2
R4: P2.8 R-r4.2
R5: P2.1 R-r5.2 | length 2
  Bottom Layer w0.88: R-r5.2 P2.1
R6: P2.3 R-r6.2 | length 2
  Bottom Layer w0.8: R-r6.2 P2.3
R7: P2.5 R-r7.2 | length 2
  Bottom Layer w0.8: R-r7.2 P2.5
R8: P2.7 R-r8.2 | length 2
  Bottom Layer w0.8: R-r8.2 P2.7
VCC: bb.20 bg.20 br.20 d1.9 d2.9 J1.1 P_b2.4 P_b3.1 P_b4.1 P_b5.4 P_b7.4 P_b8.4 | length 144.1
  Bottom Layer w0.4: br.20 83.693,94.516 83.693,94.107 ; P_b8.4 92.456,79.756 85.09,79.756 83.693,81.153 83.693,94.107 ; bb.20 99.977,97.282 ; P_b7.4 125.476,81.28 ; bg.20 116.84,98.933 115.189,97.282 99.977,97.282 ; 83.693,94.107 86.868,97.282 99.977,97.282
  Bottom Layer w0.5: d2.9 83.185,122.174 113.157,122.174 114.3,123.317 P_b2.4 ; d1.9 107.315,122.174 ; 125.476,81.28 127.889,83.693 127.889,88.138 129.039,89.288 J1.1
pads on no net: J1. J1.2 J1.3 J1.4 P-b1.18 P-b1.20 P-b1.22 P-b1.24 P-b1.26 P-b1.28 P-b1.30 P_b2.2 P_b3.3 P_b4.3 P_b5.2 P_b7.2 P_b8.2 ps2.1 ps2.2 ps2.3 ps2.4 ps2.5 ps2.6 ps2.S

## Keep-outs
Keep-Out Layer:
  lines w0.254: 52.07,77.47 52.07,146.05 137.16,146.05 137.16,77.47 52.07,77.47

## Other copper
Bottom Layer:
  text "." at 118.364,94.234 h1
  text "." at 98.044,94.107 h1
  text "." at 78.994,93.853 h1

## Silkscreen, mask and mechanical layers (free items; w line width, h text height)
Top Overlay:
  text "Vcc" at 95.885,143.764 h0.5
  text "3.3" at 98.425,143.764 h0.5
  text "GND" at 103.505,143.764 h0.5
  text "Vcc" at 116.205,143.764 h0.5
  text "3.3" at 118.745,143.764 h0.5
  text "GND" at 123.825,143.764 h0.5
  text "P87" at 85.217,140.335 h0.4
  text "P84" at 87.376,140.335 h0.4
  text "P82" at 89.916,140.335 h0.4
  text "P80" at 92.456,140.335 h0.4
  text "P78" at 95.123,140.335 h0.4
  text "P74" at 97.663,140.335 h0.4
  text "P66" at 100.076,140.335 h0.4
  text "P58" at 102.616,140.335 h0.4
  text "P56" at 105.156,140.335 h0.4
  text "P51" at 107.823,140.335 h0.4
  text "P47" at 110.49,140.335 h0.4
  text "P45" at 112.776,140.335 h0.4
  text "P43" at 115.316,140.335 h0.4
  text "P40" at 117.856,140.335 h0.4
  text "P34" at 120.396,140.335 h0.4
  text "P32" at 122.936,140.335 h0.4
  text "P85" at 84.963,136.144 h0.4
  text "P83" at 87.376,136.144 h0.4
  text "P81" at 90.043,136.144 h0.4
  text "P79" at 92.456,136.144 h0.4
  text "P75" at 94.996,136.144 h0.4
  text "P67" at 97.536,136.144 h0.4
  text "P59" at 100.076,136.144 h0.4
  text "P57" at 102.616,136.144 h0.4
  text "P55" at 105.156,136.144 h0.4
  text "P48" at 107.696,136.144 h0.4
  text "P46" at 110.236,136.144 h0.4
  text "P44" at 112.776,136.144 h0.4
  text "P41" at 115.443,136.144 h0.4
  text "P35" at 117.856,136.144 h0.4
  text "P33" at 120.396,136.144 h0.4
  text "P30" at 122.936,136.144 h0.4
  text "GND" at 85.725,132.715 h0.5
  text "3.3" at 90.805,132.715 h0.5
  text "Vcc" at 93.472,132.715 h0.5
  text "GND" at 106.045,132.715 h0.5
  text "3.3" at 111.125,132.715 h0.5
  text "Vcc" at 113.665,132.715 h0.5
  text "P111" at 85.725,85.344 h0.4
  text "P112" at 88.265,85.344 h0.4
  text "P114" at 90.805,85.344 h0.4
  text "P115" at 93.345,85.344 h0.4
  text "P116" at 95.885,85.344 h0.4
  text "P117" at 98.425,85.344 h0.4
  text "P118" at 100.965,85.344 h0.4
  text "P119" at 103.505,85.344 h0.4
  text "P120" at 106.045,85.344 h0.4
  text "P121" at 108.585,85.344 h0.4
  text "P123" at 111.125,85.344 h0.4
  text "P124" at 113.665,85.344 h0.4
  text "P126" at 116.205,85.344 h0.4
  text "P127" at 118.745,85.344 h0.4
  text "P131" at 121.285,85.344 h0.4
  text "P132" at 123.825,85.344 h0.4
  text "GND" at 85.725,79.375 h0.5
  text "3.3" at 90.805,79.375 h0.5
  text "Vcc" at 93.345,79.375 h0.5
  text "GND" at 108.585,79.375 h0.5
  text "3.3" at 113.665,79.375 h0.5
  text "Vcc" at 116.205,79.375 h0.5
Drill Drawing:
  text ".LEGEND" at 150.622,88.773 h1.52
  text "Drill Drawing." at 150.622,86.233 h1.52

## Dimensions
52.07,77.47 to 52.07,146.05 on Mechanical 1
52.07,77.47 to 137.16,77.47 on Mechanical 1

## Text inside footprints (layer, text, board x,y; h text height)
P2: Top Overlay "39" at 121.412,109.728 h1.27; Top Overlay "40" at 121.412,112.268 h1.27; Top Overlay "2" at 68.58,112.268 h1.27; Top Overlay "1" at 68.58,109.728 h1.27
P-b1: Top Overlay "2" at 83.82,139.192 h0.8; Top Overlay "1" at 83.82,136.652 h0.8; Top Overlay "31" at 125.984,136.652 h0.8; Top Overlay "32" at 125.984,139.192 h0.8